# Altium PCB Pleiades.PcbDoc
Units mil, origin at the board's own origin, x right, y up, seen from the top; angles counter-clockwise.
Board outline 12244.09 x 4515.28 mil, 12 copper layers (TOP, GND1, IN1, GND2, POW1, GND3, POW2, GND4, GND5, IN2, GND6, BOT), stack 63.546 mil thick; 2 components, 552 nets, 714 pads, 1 vias.
Unrouted connection lines stored in the file: 15.
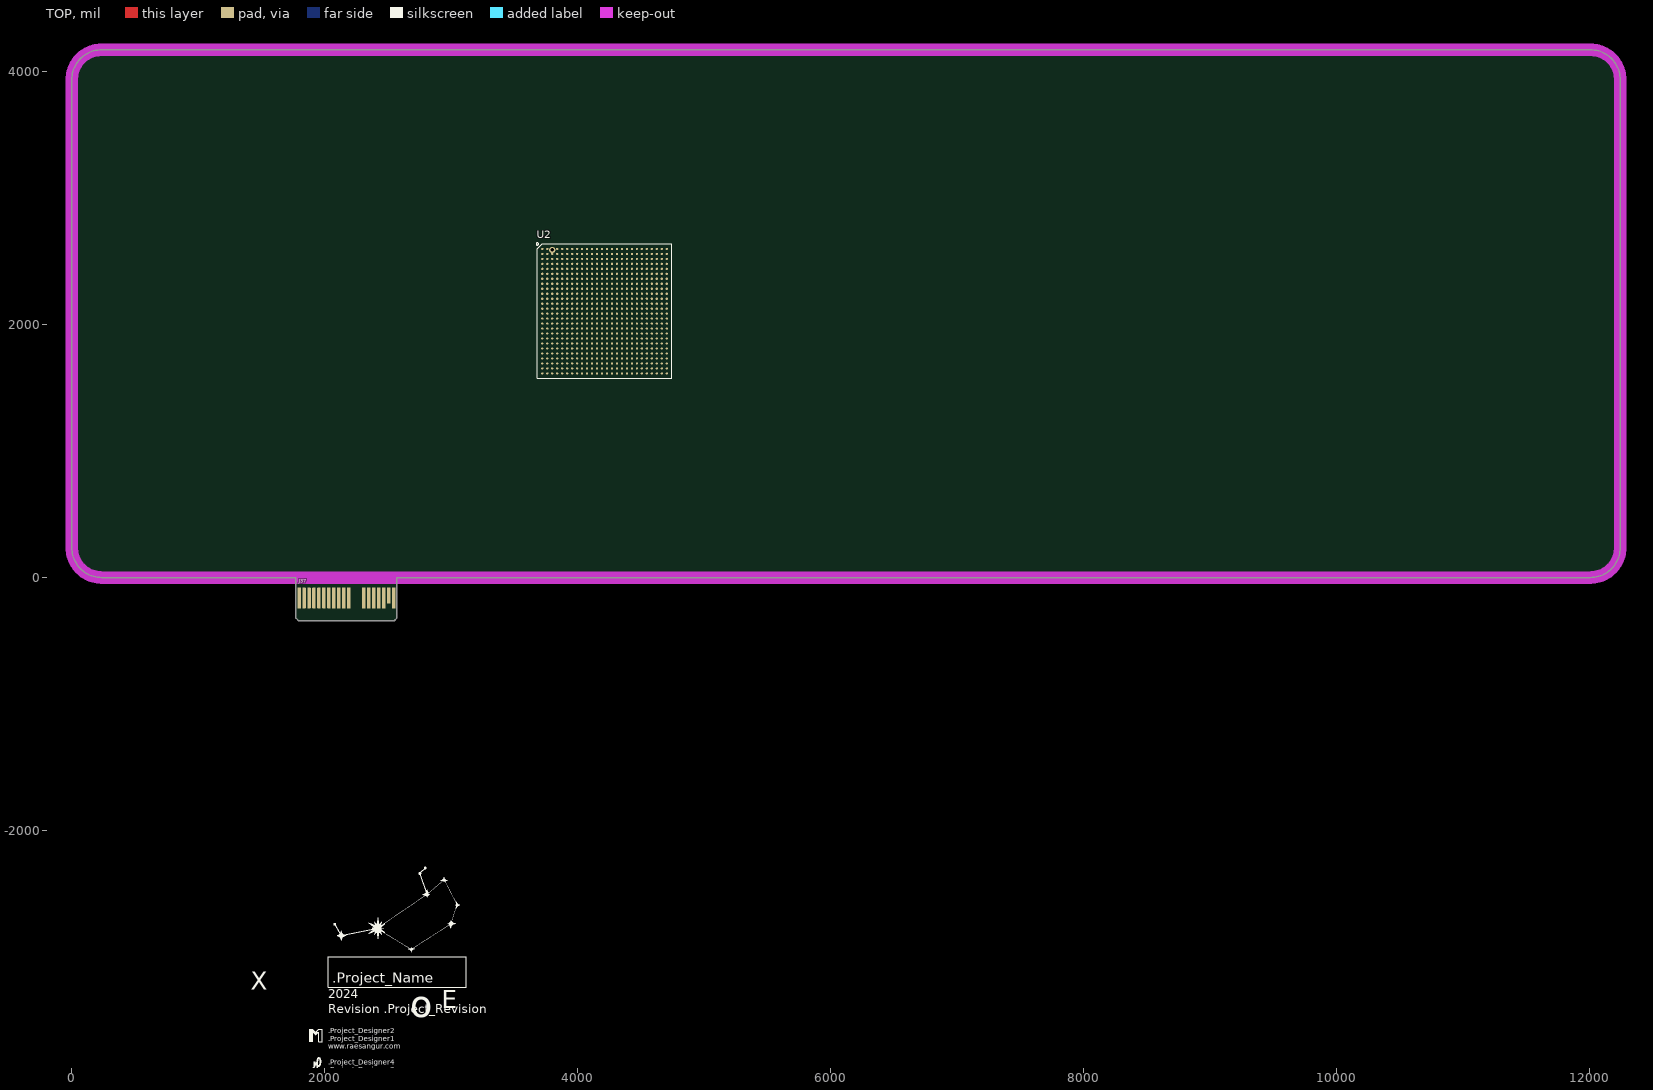
[diagram p0: TOP view]
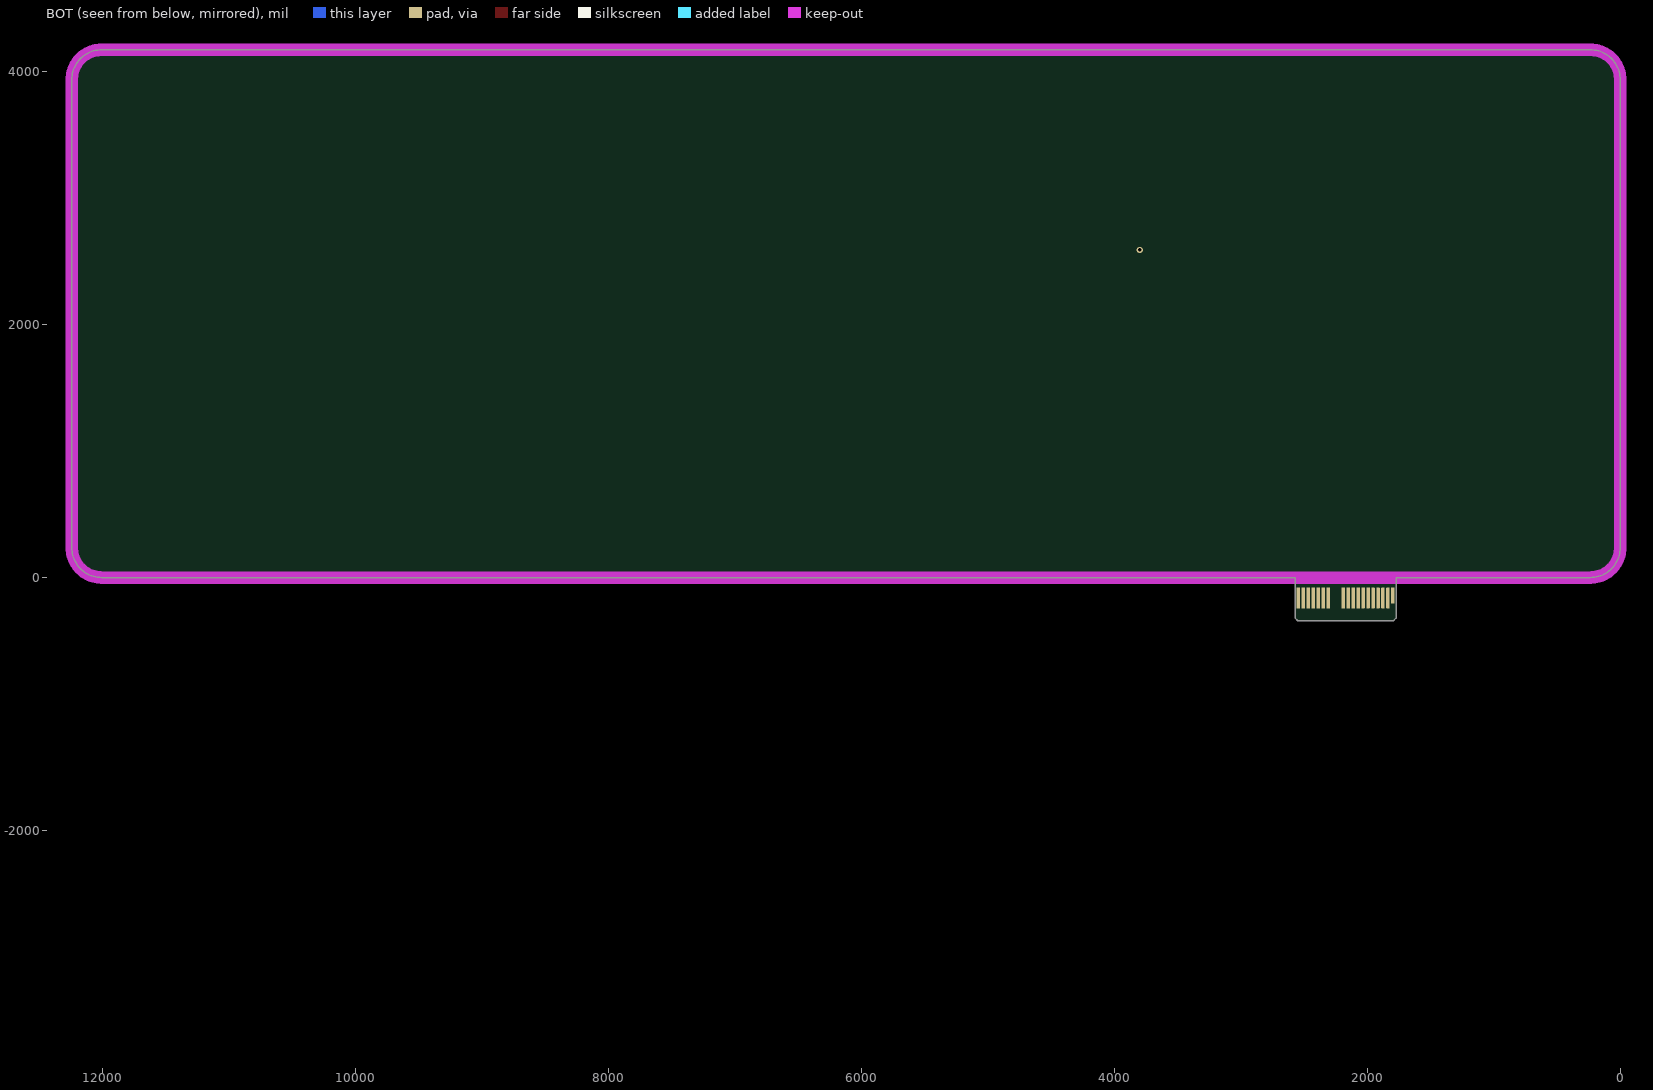
[diagram p1: BOT view, seen from below]

## Layer stack, top to bottom
Top Solder: solder mask 0.4, Solder Resist, Dk 3.5
TOP: signal copper 1.378
Dielectric 1: prepreg 3.15, ISO106/1080, Dk 3.5
GND1: signal copper 0.689
Dielectric 8: core 7, S1170G, Dk 4.4
IN1: signal copper 0.689
Dielectric 9: prepreg 3.15, ISO106/1080, Dk 3.5
GND2: signal copper 0.689
Dielectric 2: core 7, S1170G, Dk 4.4
POW1: signal copper 0.689
Dielectric 5: prepreg 3.15, ISO106/1080, Dk 3.5
GND3: signal copper 0.689
Dielectric 3: core 7, S1170G, Dk 4.4
POW2: signal copper 0.689
Dielectric 4: prepreg 3.15, ISO106/1080, Dk 3.5
GND4: signal copper 0.689
Dielectric 7: core 7, S1170G, Dk 4.4
GND5: signal copper 0.689
Dielectric 6: prepreg 3.15, ISO106/1080, Dk 3.5
IN2: signal copper 0.689
Dielectric 11: core 7, S1170G, Dk 4.4
GND6: signal copper 0.689
Dielectric 10: prepreg 3.15, ISO106/1080, Dk 3.5
BOT: signal copper 1.378
Bottom Solder: solder mask 0.4, Solder Resist, Dk 3.5

## Board outline
0,236.22 0,3937.01 cw(c236.22,3937.01) 236.22,4173.23 12007.87,4173.23 cw(c12007.87,3937.01) 12244.09,3937.01 12244.09,236.22 cw(c12007.88,236.21) 12007.87,0 2570.68,0 2570.68,-320.59 2549.21,-342.05 1793.78,-342.05 1772.31,-320.59 1772.31,0 236.22,0 cw(c236.22,236.22)

## Design rules (kind name [scope] priority, off if disabled: settings)
Clearance [All] p1: gap=6 ignorepadtopadclearanceinfootprint=FALSE except(0: Arc-Hole Track-Hole SMDPad-Hole THPad-Hole Via-Hole Fill-Hole Poly-Hole Region-Hole Text-Hole)
ComponentClearance "Schematic Component Clearance Constraint" [InComponent('F2')] p1: gap=-1 collisioncheckmode=3 verticalgap=10 showdistances=FALSE
ComponentClearance [All] p2: gap=4 collisioncheckmode=3 verticalgap=4 showdistances=FALSE
DiffPairsRouting [All] p1: maxlimit=10 minlimit=10 mostfreqgap=10 toplayer_minwidth=15 toplayer_maxwidth=15 toplayer_prefwidth=15 midlayer1_minwidth=15 midlayer1_maxwidth=15 midlayer1_prefwidth=15 midlayer2_minwidth=15 midlayer2_maxwidth=15 midlayer2_prefwidth=15 midlayer3_minwidth=15 midlayer3_maxwidth=15 midlayer3_prefwidth=15 midlayer4_minwidth=15 midlayer4_maxwidth=15 midlayer4_prefwidth=15 midlayer5_minwidth=15 midlayer5_maxwidth=15 midlayer5_prefwidth=15 midlayer6_minwidth=15 midlayer6_maxwidth=15 midlayer6_prefwidth=15 midlayer7_minwidth=15 midlayer7_maxwidth=15 midlayer7_prefwidth=15 midlayer8_minwidth=15 midlayer8_maxwidth=15 midlayer8_prefwidth=15 midlayer9_minwidth=15 midlayer9_maxwidth=15 midlayer9_prefwidth=15 midlayer10_minwidth=15 midlayer10_maxwidth=15 midlayer10_prefwidth=15 bottomlayer_minwidth=15 bottomlayer_maxwidth=15 bottomlayer_prefwidth=15 maxuncoupledlength=500
HoleSize [All] p1: absolutevalues=TRUE maxlimit=1000 minlimit=4 maxpercent=80.000 minpercent=20.000
HoleToHoleClearance [All] p1: gap=10 allowstackedmicrovias=FALSE
MinimumSolderMaskSliver [All] p1: minsoldermaskwidth=4
PlaneClearance [All] p1: clearance=6
PlaneConnect [All] p1: pad.planeconnectstyle=Relief pad.reliefexpansion=20 pad.reliefentries=4 pad.reliefconductorwidth=10 pad.reliefairgap=10 via.planeconnectstyle=Direct via.reliefexpansion=20 via.reliefentries=4 via.reliefconductorwidth=10 via.reliefairgap=10
PolygonConnect [All] p1: thpad.connectstyle=Relief thpad.reliefconductorwidth=10 thpad.reliefentries=4 thpad.polygonreliefangle="90 Angle" thpad.airgapwidth=10 smdpad.connectstyle=Direct smdpad.reliefconductorwidth=10 smdpad.reliefentries=4 smdpad.polygonreliefangle="90 Angle" smdpad.airgapwidth=10 via.connectstyle=Direct via.reliefconductorwidth=10 via.reliefentries=4 via.polygonreliefangle="90 Angle" via.airgapwidth=10
RoutingVias [All] p1: holewidth=10 width=20 viastyle="Through Hole" minholewidth=10 minwidth=20 maxholewidth=10 maxwidth=20
SilkToSilkClearance [All] p1: silktosilkclearance=4
SilkToSolderMaskClearance [IsPad] p1: minsilkscreentomaskgap=2 clearancetoexposedcopper=FALSE
SolderMaskExpansion [All] p1: expansion=2 istentingtop=FALSE
Width [All] p1: maxlimit=5 minlimit=5 preferedwidth=16.59 toplayer_prefwidth=20.9 midlayer3_prefwidth=6 midlayer4_prefwidth=6 midlayer5_prefwidth=6 midlayer6_prefwidth=6 midlayer7_prefwidth=6 midlayer8_prefwidth=6 midlayer9_prefwidth=6 midlayer10_prefwidth=6 bottomlayer_prefwidth=20.9 impedanceprofiledriven=TRUE minimp=50.000000 maximp=50.000000 favimp=50.000000
21 further rules are at their usual default settings.

## Classes and differential pairs
net class PCI: HSI0_N HSI0_P HSO0_N HSO0_P PCI_HSI0_16_N PCI_HSI0_16_P PCI_HSO0_16_N PCI_HSO0_16_P PCI_REFCLK_16_N PCI_REFCLK_16_P REFCLK_N REFCLK_P
net class MII: COL_CONFIG0 CRS_CONFIG1 INTRP MDC MDIO RST_ETH_PHY RXC RXD0 RXD1 RXD2 RXD3 RXDV RXER TXC TXD0 TXD1 TXD2 TXD3 TXEN TXER
net class IO[0..7]: IO0 IO1 IO2 IO3 IO4 IO5 IO6 IO7
component class PCI: J37
net class USB: DD_14_+ DD_14_- UD_14_+ UD_14_-
net class SD_D[0..3]: SD_D0 SD_D1 SD_D2 SD_D3
net class PROM_D[0..7]: PROM_D0 PROM_D1 PROM_D2 PROM_D3 PROM_D4 PROM_D5 PROM_D6 PROM_D7
net class JTAG: \PCI_TRST PCI_TCK PCI_TDI PCI_TDO PCI_TMS TCK_USB TDI_USB TDO_USB TMS_USB
net class ETHERNET: RD_15_+ RD_15_- RX_15_+ RX_15_- TD_15_+ TD_15_- TX_15_+ TX_15_-
net class DQ[0..15]: DQ0 DQ1 DQ2 DQ3 DQ4 DQ5 DQ6 DQ7 DQ8 DQ9 DQ10 DQ11 DQ12 DQ13 DQ14 DQ15
net class DEBUG_LED_[1..4]: DEBUG_LED_1 DEBUG_LED_2 DEBUG_LED_3 DEBUG_LED_4
net class DDR_DATA: DQ0 DQ1 DQ2 DQ3 DQ4 DQ5 DQ6 DQ7 DQ8 DQ9 DQ10 DQ11 DQ12 DQ13 DQ14 DQ15 LDQS_N LDQS_P UDQS_N UDQS_P
net class DDR_CLK: CK_N CK_P LDQS_N LDQS_P UDQS_N UDQS_P
net class DDR_ADDR: A0 A1 A2 A3 A4 A5 A6 A7 A8 A9 A10 A11 A12 A13 A14 BA0 BA1 BA2
net class DAC_DIFF: D0_N D0_P D1_N D1_P D2_N D2_P D3_N D3_P D4_N D4_P D5_N D5_P D6_N D6_P D7_N D7_P DCI_N DCI_P FRAME_N FRAME_P
net class CLK: CLK_ADC_400MHZ_3_N CLK_ADC_400MHZ_3_P CLK_ADC_OUT_N CLK_ADC_OUT_P CLK_DAC_200MHZ_3_N CLK_DAC_200MHZ_3_P CLK_FPGA_100MHZ_N CLK_FPGA_100MHZ_P OSC_125MHZ_5_N OSC_125MHZ_5_P
net class BA[0..2]: BA0 BA1 BA2
net class ACC: \CAS \DDR_CS \DDR_RESET \RAS \WE A0 A1 A2 A3 A4 A5 A6 A7 A8 A9 A10 A11 A12 A13 A14 BA0 BA1 BA2 CK_N CK_P LDM ODT UDM
net class A[0..14]: A0 A1 A2 A3 A4 A5 A6 A7 A8 A9 A10 A11 A12 A13 A14
component class "POWER INPUT": WA1
differential pair REFCLK: +REFCLK_P -REFCLK_N
differential pair PCI_REFCLK_16: +PCI_REFCLK_16_P -PCI_REFCLK_16_N
differential pair PCI_HSO0_16: +PCI_HSO0_16_P -PCI_HSO0_16_N
differential pair PCI_HSI0_16: +PCI_HSI0_16_P -PCI_HSI0_16_N
differential pair HSO0: +HSO0_P -HSO0_N
differential pair HSI0: +HSI0_P -HSI0_N
differential pair UDQS: +UDQS_P -UDQS_N
differential pair UD_14: +UD_14_+ -UD_14_-
differential pair TX_15: +TX_15_+ -TX_15_-
differential pair TD_15: +TD_15_+ -TD_15_-
differential pair RX_15: +RX_15_+ -RX_15_-
differential pair RD_15: +RD_15_+ -RD_15_-
differential pair OSC_125MHZ_5: +OSC_125MHZ_5_P -OSC_125MHZ_5_N
differential pair LDQS: +LDQS_P -LDQS_N
differential pair FRAME: +FRAME_P -FRAME_N
differential pair DD_14: +DD_14_+ -DD_14_-
differential pair DCI: +DCI_P -DCI_N
differential pair D7: +D7_P -D7_N
differential pair D6: +D6_P -D6_N
differential pair D5: +D5_P -D5_N
differential pair D4: +D4_P -D4_N
differential pair D3: +D3_P -D3_N
differential pair D2: +D2_P -D2_N
differential pair D1: +D1_P -D1_N
differential pair D0: +D0_P -D0_N
differential pair CLK_FPGA_100MHZ: +CLK_FPGA_100MHZ_P -CLK_FPGA_100MHZ_N
differential pair CLK_DAC_200MHZ_3: +CLK_DAC_200MHZ_3_P -CLK_DAC_200MHZ_3_N
differential pair CLK_ADC_OUT: +CLK_ADC_OUT_P -CLK_ADC_OUT_N
differential pair CLK_ADC_400MHZ_3: +CLK_ADC_400MHZ_3_P -CLK_ADC_400MHZ_3_N
differential pair CK: +CK_P -CK_N

## Components (designator, comment, footprint, x,y, rotation, side; value= is the part's Value field where it differs from the comment)
J37 "PCIe_x1" PCIe_x1 1797.24,-161.42 r0 top locked
U2 "XC6SLX100-3FGG676C" FPGA_XILINX_FGG676 4212.6,2106.3 r0 top

## Footprints (in the part's own frame and the unit in brackets; to place one, negate y for a bottom-side part, rotate by r counter-clockwise, add the part's x,y. Pads: shape width x height; smd on the part's side, far side on the other; paste and mask are expansions set on the pad)
FPGA_XILINX_FGG676 [mm]
  round 0.45 smd mask+0.05: A1(-12.5,12.5) A2(-11.5,12.5) A3(-10.5,12.5) A4(-9.5,12.5) A5(-8.5,12.5) A6(-7.5,12.5) A7(-6.5,12.5) A8(-5.5,12.5) A9(-4.5,12.5) A10(-3.5,12.5) A11(-2.5,12.5) A12(-1.5,12.5) A13(-0.5,12.5) A14(0.5,12.5) A15(1.5,12.5) A16(2.5,12.5) A17(3.5,12.5) A18(4.5,12.5) A19(5.5,12.5) A20(6.5,12.5) A21(7.5,12.5) A22(8.5,12.5) A23(9.5,12.5) A24(10.5,12.5) A25(11.5,12.5) A26(12.5,12.5) AA1(-12.5,-7.5) AA2(-11.5,-7.5) AA3(-10.5,-7.5) AA4(-9.5,-7.5) AA5(-8.5,-7.5) AA6(-7.5,-7.5) AA7(-6.5,-7.5) AA8(-5.5,-7.5) AA9(-4.5,-7.5) AA10(-3.5,-7.5) AA11(-2.5,-7.5) AA12(-1.5,-7.5) AA13(-0.5,-7.5) AA14(0.5,-7.5) AA15(1.5,-7.5) AA16(2.5,-7.5) AA17(3.5,-7.5) AA18(4.5,-7.5) AA19(5.5,-7.5) AA20(6.5,-7.5) AA21(7.5,-7.5) AA22(8.5,-7.5) AA23(9.5,-7.5) AA24(10.5,-7.5) AA25(11.5,-7.5) AA26(12.5,-7.5) AB1(-12.5,-8.5) AB2(-11.5,-8.5) AB3(-10.5,-8.5) AB4(-9.5,-8.5) AB5(-8.5,-8.5) AB6(-7.5,-8.5) AB7(-6.5,-8.5) AB8(-5.5,-8.5) AB9(-4.5,-8.5) AB10(-3.5,-8.5) AB11(-2.5,-8.5) AB12(-1.5,-8.5) AB13(-0.5,-8.5) AB14(0.5,-8.5) AB15(1.5,-8.5) AB16(2.5,-8.5) AB17(3.5,-8.5) AB18(4.5,-8.5) AB19(5.5,-8.5) AB20(6.5,-8.5) AB21(7.5,-8.5) AB22(8.5,-8.5) AB23(9.5,-8.5) AB24(10.5,-8.5) AB25(11.5,-8.5) AB26(12.5,-8.5) AC1(-12.5,-9.5) AC2(-11.5,-9.5) AC3(-10.5,-9.5) AC4(-9.5,-9.5) AC5(-8.5,-9.5) AC6(-7.5,-9.5) AC7(-6.5,-9.5) AC8(-5.5,-9.5) AC9(-4.5,-9.5) AC10(-3.5,-9.5) AC11(-2.5,-9.5) AC12(-1.5,-9.5) AC13(-0.5,-9.5) AC14(0.5,-9.5) AC15(1.5,-9.5) AC16(2.5,-9.5) AC17(3.5,-9.5) AC18(4.5,-9.5) AC19(5.5,-9.5) AC20(6.5,-9.5) AC21(7.5,-9.5) AC22(8.5,-9.5) AC23(9.5,-9.5) AC24(10.5,-9.5) AC25(11.5,-9.5) AC26(12.5,-9.5) AD1(-12.5,-10.5) AD2(-11.5,-10.5) AD3(-10.5,-10.5) AD4(-9.5,-10.5) AD5(-8.5,-10.5) AD6(-7.5,-10.5) AD7(-6.5,-10.5) AD8(-5.5,-10.5) AD9(-4.5,-10.5) AD10(-3.5,-10.5) AD11(-2.5,-10.5) AD12(-1.5,-10.5) AD13(-0.5,-10.5) AD14(0.5,-10.5) AD15(1.5,-10.5) AD16(2.5,-10.5) AD17(3.5,-10.5) AD18(4.5,-10.5) AD19(5.5,-10.5) AD20(6.5,-10.5) AD21(7.5,-10.5) AD22(8.5,-10.5) AD23(9.5,-10.5) AD24(10.5,-10.5) AD25(11.5,-10.5) AD26(12.5,-10.5) AE1(-12.5,-11.5) AE2(-11.5,-11.5) AE3(-10.5,-11.5) AE4(-9.5,-11.5) AE5(-8.5,-11.5) AE6(-7.5,-11.5) AE7(-6.5,-11.5) AE8(-5.5,-11.5) AE9(-4.5,-11.5) AE10(-3.5,-11.5) AE11(-2.5,-11.5) AE12(-1.5,-11.5) AE13(-0.5,-11.5) AE14(0.5,-11.5) AE15(1.5,-11.5) AE16(2.5,-11.5) AE17(3.5,-11.5) AE18(4.5,-11.5) AE19(5.5,-11.5) AE20(6.5,-11.5) AE21(7.5,-11.5) AE22(8.5,-11.5) AE23(9.5,-11.5) AE24(10.5,-11.5) AE25(11.5,-11.5) AE26(12.5,-11.5) AF1(-12.5,-12.5) AF2(-11.5,-12.5) AF3(-10.5,-12.5) AF4(-9.5,-12.5) AF5(-8.5,-12.5) AF6(-7.5,-12.5) AF7(-6.5,-12.5) AF8(-5.5,-12.5) AF9(-4.5,-12.5) AF10(-3.5,-12.5) AF11(-2.5,-12.5) AF12(-1.5,-12.5) AF13(-0.5,-12.5) AF14(0.5,-12.5) AF15(1.5,-12.5) AF16(2.5,-12.5) AF17(3.5,-12.5) AF18(4.5,-12.5) AF19(5.5,-12.5) AF20(6.5,-12.5) AF21(7.5,-12.5) AF22(8.5,-12.5) AF23(9.5,-12.5) AF24(10.5,-12.5) AF25(11.5,-12.5) AF26(12.5,-12.5) B1(-12.5,11.5) B2(-11.5,11.5) B3(-10.5,11.5) B4(-9.5,11.5) B5(-8.5,11.5) B6(-7.5,11.5) B7(-6.5,11.5) B8(-5.5,11.5) B9(-4.5,11.5) B10(-3.5,11.5) B11(-2.5,11.5) B12(-1.5,11.5) B13(-0.5,11.5) B14(0.5,11.5) B15(1.5,11.5) B16(2.5,11.5) B17(3.5,11.5) B18(4.5,11.5) B19(5.5,11.5) B20(6.5,11.5) B21(7.5,11.5) B22(8.5,11.5) B23(9.5,11.5) B24(10.5,11.5) B25(11.5,11.5) B26(12.5,11.5) C1(-12.5,10.5) C2(-11.5,10.5) C3(-10.5,10.5) C4(-9.5,10.5) C5(-8.5,10.5) C6(-7.5,10.5) C7(-6.5,10.5) C8(-5.5,10.5) C9(-4.5,10.5) C10(-3.5,10.5) C11(-2.5,10.5) C12(-1.5,10.5) C13(-0.5,10.5) C14(0.5,10.5) C15(1.5,10.5) C16(2.5,10.5) C17(3.5,10.5) C18(4.5,10.5) C19(5.5,10.5) C20(6.5,10.5) C21(7.5,10.5) C22(8.5,10.5) C23(9.5,10.5) C24(10.5,10.5) C25(11.5,10.5) C26(12.5,10.5) D1(-12.5,9.5) D2(-11.5,9.5) D3(-10.5,9.5) D4(-9.5,9.5) D5(-8.5,9.5) D6(-7.5,9.5) D7(-6.5,9.5) D8(-5.5,9.5) D9(-4.5,9.5) D10(-3.5,9.5) D11(-2.5,9.5) D12(-1.5,9.5) D13(-0.5,9.5) D14(0.5,9.5) D15(1.5,9.5) D16(2.5,9.5) D17(3.5,9.5) D18(4.5,9.5) D19(5.5,9.5) D20(6.5,9.5) D21(7.5,9.5) D22(8.5,9.5) D23(9.5,9.5) D24(10.5,9.5) D25(11.5,9.5) D26(12.5,9.5) E1(-12.5,8.5) E2(-11.5,8.5) E3(-10.5,8.5) E4(-9.5,8.5) E5(-8.5,8.5) E6(-7.5,8.5) E7(-6.5,8.5) E8(-5.5,8.5) E9(-4.5,8.5) E10(-3.5,8.5) E11(-2.5,8.5) E12(-1.5,8.5) E13(-0.5,8.5) E14(0.5,8.5) E15(1.5,8.5) E16(2.5,8.5) E17(3.5,8.5) E18(4.5,8.5) E19(5.5,8.5) E20(6.5,8.5) E21(7.5,8.5) E22(8.5,8.5) E23(9.5,8.5) E24(10.5,8.5) E25(11.5,8.5) E26(12.5,8.5) F1(-12.5,7.5) F2(-11.5,7.5) F3(-10.5,7.5) F4(-9.5,7.5) F5(-8.5,7.5) F6(-7.5,7.5) F7(-6.5,7.5) F8(-5.5,7.5) F9(-4.5,7.5) F10(-3.5,7.5) F11(-2.5,7.5) F12(-1.5,7.5) F13(-0.5,7.5) F14(0.5,7.5) F15(1.5,7.5) F16(2.5,7.5) F17(3.5,7.5) F18(4.5,7.5) F19(5.5,7.5) F20(6.5,7.5) F21(7.5,7.5) F22(8.5,7.5) F23(9.5,7.5) F24(10.5,7.5) F25(11.5,7.5) F26(12.5,7.5) G1(-12.5,6.5) G2(-11.5,6.5) G3(-10.5,6.5) G4(-9.5,6.5) G5(-8.5,6.5) G6(-7.5,6.5) G7(-6.5,6.5) G8(-5.5,6.5) G9(-4.5,6.5) G10(-3.5,6.5) G11(-2.5,6.5) G12(-1.5,6.5) G13(-0.5,6.5) G14(0.5,6.5) G15(1.5,6.5) G16(2.5,6.5) G17(3.5,6.5) G18(4.5,6.5) G19(5.5,6.5) G20(6.5,6.5) G21(7.5,6.5) G22(8.5,6.5) G23(9.5,6.5) G24(10.5,6.5) G25(11.5,6.5) G26(12.5,6.5) H1(-12.5,5.5) H2(-11.5,5.5) H3(-10.5,5.5) H4(-9.5,5.5) H5(-8.5,5.5) H6(-7.5,5.5) H7(-6.5,5.5) H8(-5.5,5.5) H9(-4.5,5.5) H10(-3.5,5.5) H11(-2.5,5.5) H12(-1.5,5.5) H13(-0.5,5.5) H14(0.5,5.5) H15(1.5,5.5) H16(2.5,5.5) H17(3.5,5.5) H18(4.5,5.5) H19(5.5,5.5) H20(6.5,5.5) H21(7.5,5.5) H22(8.5,5.5) H23(9.5,5.5) H24(10.5,5.5) H25(11.5,5.5) H26(12.5,5.5) J1(-12.5,4.5) J2(-11.5,4.5) J3(-10.5,4.5) J4(-9.5,4.5) J5(-8.5,4.5) J6(-7.5,4.5) J7(-6.5,4.5) J8(-5.5,4.5) J9(-4.5,4.5) J10(-3.5,4.5) J11(-2.5,4.5) J12(-1.5,4.5) J13(-0.5,4.5) J14(0.5,4.5) J15(1.5,4.5) J16(2.5,4.5) J17(3.5,4.5) J18(4.5,4.5) J19(5.5,4.5) J20(6.5,4.5) J21(7.5,4.5) J22(8.5,4.5) J23(9.5,4.5) J24(10.5,4.5) J25(11.5,4.5) J26(12.5,4.5) K1(-12.5,3.5) K2(-11.5,3.5) K3(-10.5,3.5) K4(-9.5,3.5) K5(-8.5,3.5) K6(-7.5,3.5) K7(-6.5,3.5) K8(-5.5,3.5) K9(-4.5,3.5) K10(-3.5,3.5) K11(-2.5,3.5) K12(-1.5,3.5) K13(-0.5,3.5) K14(0.5,3.5) K15(1.5,3.5) K16(2.5,3.5) K17(3.5,3.5) K18(4.5,3.5) K19(5.5,3.5) K20(6.5,3.5) K21(7.5,3.5) K22(8.5,3.5) K23(9.5,3.5) K24(10.5,3.5) K25(11.5,3.5) K26(12.5,3.5) L1(-12.5,2.5) L2(-11.5,2.5) L3(-10.5,2.5) L4(-9.5,2.5) L5(-8.5,2.5) L6(-7.5,2.5) L7(-6.5,2.5) L8(-5.5,2.5) L9(-4.5,2.5) L10(-3.5,2.5) L11(-2.5,2.5) L12(-1.5,2.5) L13(-0.5,2.5) L14(0.5,2.5) L15(1.5,2.5) L16(2.5,2.5) L17(3.5,2.5) L18(4.5,2.5) L19(5.5,2.5) L20(6.5,2.5) L21(7.5,2.5) L22(8.5,2.5) L23(9.5,2.5) L24(10.5,2.5) L25(11.5,2.5) L26(12.5,2.5) M1(-12.5,1.5) M2(-11.5,1.5) M3(-10.5,1.5) M4(-9.5,1.5) M5(-8.5,1.5) M6(-7.5,1.5) M7(-6.5,1.5) M8(-5.5,1.5) M9(-4.5,1.5) M10(-3.5,1.5) M11(-2.5,1.5) M12(-1.5,1.5) M13(-0.5,1.5) M14(0.5,1.5) M15(1.5,1.5) M16(2.5,1.5) M17(3.5,1.5) M18(4.5,1.5) M19(5.5,1.5) M20(6.5,1.5) M21(7.5,1.5) M22(8.5,1.5) M23(9.5,1.5) M24(10.5,1.5) M25(11.5,1.5) M26(12.5,1.5) N1(-12.5,0.5) N2(-11.5,0.5) N3(-10.5,0.5) N4(-9.5,0.5) N5(-8.5,0.5) N6(-7.5,0.5) N7(-6.5,0.5) N8(-5.5,0.5) N9(-4.5,0.5) N10(-3.5,0.5) N11(-2.5,0.5) N12(-1.5,0.5) N13(-0.5,0.5) N14(0.5,0.5) N15(1.5,0.5) N16(2.5,0.5) N17(3.5,0.5) N18(4.5,0.5) N19(5.5,0.5) N20(6.5,0.5) N21(7.5,0.5) N22(8.5,0.5) N23(9.5,0.5) N24(10.5,0.5) N25(11.5,0.5) N26(12.5,0.5) P1(-12.5,-0.5) P2(-11.5,-0.5) P3(-10.5,-0.5) P4(-9.5,-0.5) P5(-8.5,-0.5) P6(-7.5,-0.5) P7(-6.5,-0.5) P8(-5.5,-0.5) P9(-4.5,-0.5) P10(-3.5,-0.5) P11(-2.5,-0.5) P12(-1.5,-0.5) P13(-0.5,-0.5) P14(0.5,-0.5) P15(1.5,-0.5) P16(2.5,-0.5) P17(3.5,-0.5) P18(4.5,-0.5) P19(5.5,-0.5) P20(6.5,-0.5) P21(7.5,-0.5) P22(8.5,-0.5) P23(9.5,-0.5) P24(10.5,-0.5) P25(11.5,-0.5) P26(12.5,-0.5) R1(-12.5,-1.5) R2(-11.5,-1.5) R3(-10.5,-1.5) R4(-9.5,-1.5) R5(-8.5,-1.5) R6(-7.5,-1.5) R7(-6.5,-1.5) R8(-5.5,-1.5) R9(-4.5,-1.5) R10(-3.5,-1.5) R11(-2.5,-1.5) R12(-1.5,-1.5) R13(-0.5,-1.5) R14(0.5,-1.5) R15(1.5,-1.5) R16(2.5,-1.5) R17(3.5,-1.5) R18(4.5,-1.5) R19(5.5,-1.5) R20(6.5,-1.5) R21(7.5,-1.5) R22(8.5,-1.5) R23(9.5,-1.5) R24(10.5,-1.5) R25(11.5,-1.5) R26(12.5,-1.5) T1(-12.5,-2.5) T2(-11.5,-2.5) T3(-10.5,-2.5) T4(-9.5,-2.5) T5(-8.5,-2.5) T6(-7.5,-2.5) T7(-6.5,-2.5) T8(-5.5,-2.5) T9(-4.5,-2.5) T10(-3.5,-2.5) T11(-2.5,-2.5) T12(-1.5,-2.5) T13(-0.5,-2.5) T14(0.5,-2.5) T15(1.5,-2.5) T16(2.5,-2.5) T17(3.5,-2.5) T18(4.5,-2.5) T19(5.5,-2.5) T20(6.5,-2.5) T21(7.5,-2.5) T22(8.5,-2.5) T23(9.5,-2.5) T24(10.5,-2.5) T25(11.5,-2.5) T26(12.5,-2.5) U1(-12.5,-3.5) U2(-11.5,-3.5) U3(-10.5,-3.5) U4(-9.5,-3.5) U5(-8.5,-3.5) U6(-7.5,-3.5) U7(-6.5,-3.5) U8(-5.5,-3.5) U9(-4.5,-3.5) U10(-3.5,-3.5) U11(-2.5,-3.5) U12(-1.5,-3.5) U13(-0.5,-3.5) U14(0.5,-3.5) U15(1.5,-3.5) U16(2.5,-3.5) U17(3.5,-3.5) U18(4.5,-3.5) U19(5.5,-3.5) U20(6.5,-3.5) U21(7.5,-3.5) U22(8.5,-3.5) U23(9.5,-3.5) U24(10.5,-3.5) U25(11.5,-3.5) U26(12.5,-3.5) V1(-12.5,-4.5) V2(-11.5,-4.5) V3(-10.5,-4.5) V4(-9.5,-4.5) V5(-8.5,-4.5) V6(-7.5,-4.5) V7(-6.5,-4.5) V8(-5.5,-4.5) V9(-4.5,-4.5) V10(-3.5,-4.5) V11(-2.5,-4.5) V12(-1.5,-4.5) V13(-0.5,-4.5) V14(0.5,-4.5) V15(1.5,-4.5) V16(2.5,-4.5) V17(3.5,-4.5) V18(4.5,-4.5) V19(5.5,-4.5) V20(6.5,-4.5) V21(7.5,-4.5) V22(8.5,-4.5) V23(9.5,-4.5) V24(10.5,-4.5) V25(11.5,-4.5) V26(12.5,-4.5) W1(-12.5,-5.5) W2(-11.5,-5.5) W3(-10.5,-5.5) W4(-9.5,-5.5) W5(-8.5,-5.5) W6(-7.5,-5.5) W7(-6.5,-5.5) W8(-5.5,-5.5) W9(-4.5,-5.5) W10(-3.5,-5.5) W11(-2.5,-5.5) W12(-1.5,-5.5) W13(-0.5,-5.5) W14(0.5,-5.5) W15(1.5,-5.5) W16(2.5,-5.5) W17(3.5,-5.5) W18(4.5,-5.5) W19(5.5,-5.5) W20(6.5,-5.5) W21(7.5,-5.5) W22(8.5,-5.5) W23(9.5,-5.5) W24(10.5,-5.5) W25(11.5,-5.5) W26(12.5,-5.5) Y1(-12.5,-6.5) Y2(-11.5,-6.5) Y3(-10.5,-6.5) Y4(-9.5,-6.5) Y5(-8.5,-6.5) Y6(-7.5,-6.5) Y7(-6.5,-6.5) Y8(-5.5,-6.5) Y9(-4.5,-6.5) Y10(-3.5,-6.5) Y11(-2.5,-6.5) Y12(-1.5,-6.5) Y13(-0.5,-6.5) Y14(0.5,-6.5) Y15(1.5,-6.5) Y16(2.5,-6.5) Y17(3.5,-6.5) Y18(4.5,-6.5) Y19(5.5,-6.5) Y20(6.5,-6.5) Y21(7.5,-6.5) Y22(8.5,-6.5) Y23(9.5,-6.5) Y24(10.5,-6.5) Y25(11.5,-6.5) Y26(12.5,-6.5)
  silkscreen extent -13.75,-13.5 13.5,13.75, body extent -13.5,-13.53 13.5,13.47, height 2.24
PCIe_x1 [mm] "https://tools.molex.com/pdm_docs/sd/877159006_sd.pdf"
  rrect10% 0.7x3.2 smd far side: A1(0,0.5)
  rrect25% 0.7x4.2 smd far side: A2(1,0) A3(2,0) A4(3,0) A5(4,0) A6(5,0) A7(6,0) A8(7,0) A9(8,0) A10(9,0) A11(10,0) A12(13,0) A13(14,0) A14(15,0) A15(16,0) A16(17,0) A17(18,0) A18(19,0)
  rrect10% 0.7x4.2 smd: B1(0,0)
  rrect25% 0.7x4.2 smd: B2(1,0) B3(2,0) B4(3,0) B5(4,0) B6(5,0) B7(6,0) B8(7,0) B9(8,0) B10(9,0) B11(10,0) B12(13,0) B13(14,0) B14(15,0) B15(16,0) B16(17,0) B18(19,0)
  rrect25% 0.7x3.2 smd: B17(18,0.5)
  round 0.381 on Top Overlay: ""(0,2.54)
  round 0.381 on Bottom Overlay: ""(0,2.54)

## Part data
U2: library part FPGA_XC6SLX100-3FGG676C, "FPGA - XILINX SPARTAN 6 480 I/O - BGA-676", Package=BGA-676, Supplier Part Number 1=122-1760-ND, Temperature="0°C ~ 85°C (TJ)", Voltage="1.14 V ~ 1.26 V", CreatedBy="Jonathan Bouchard", HelpURL=https://www.xilinx.com/support/documentation/data_sheets/ds162.pdf, Mfg=Xilinx, Mfg Part Number=XC6SLX100-3FGG676C, Supplier 1=Digikey

## Via types
v1: diameter 50, hole 28, TOP to BOT, 1 vias

## Nets (pads, with @x,y where several pads share a name; then routed paths per layer and width w, separated by ;. In a path a pad name is that pad's centre, name@x,y a point inside that pad or via, vN(x,y) a via of type N, cw(c..) or ccw(c..) an arc to the next point about the centre after c; other vN are vias at no path point)
3V3D: 
+1V2_VOLT: 
+1V2D_CURR_23: 
+1V2D_ETH: 
+1V2D_SHUNT+_17: 
+1V2D_SHUNT-_17: 
+1V8D_CURR_23: 
+1V8D_SHUNT+_17: 
+1V8D_SHUNT-_17: 
+1V8D_VOLT: 
+2V5_VOLT_23: 
+2V5D: 
+2V5D_CURR_23: 
+2V5D_SHUNT+_17: 
+2V5D_SHUNT-_17: 
+3V3_PCI: J37.A9 J37.A10 J37.B8
+3V3_SENSE: 
+3V3A: 
+3V3A_EN: 
+3V3A_ETH: 
+3V3D: 
+3V3D_CURR_23: 
+3V3D_ETH: 
+3V3D_SHUNT+_17: 
+3V3D_SHUNT-_17: 
+3V3D_VOLT_23: 
+5V0A: 
+5V0A_EN: 
+5V_MOT: 
+5V_USB_IN: 
+6V: 
+6V0_CURR_23: 
+6V0_VOLT_23: 
+6V_EN: 
+6V_SHUNT+_17: 
+6V_SHUNT-_17: 
+12V: 
+12V_CURR_23: 
+12V_MOT_SHUNT+_22: 
+12V_MOT_SHUNT-_22: 
+12V_PCI: J37.A2 J37.A3 J37.B1 J37.B2 J37.B3
+12V_SHUNT+_17: 
+12V_SHUNT-_17: 
+12V_VOLT_23: 
+24V_FILTER_CM: 
+24V_FILTER_DM: 
+24V_FUSE: 
+24V_IN: 
+24V_MOT: 
+24V_PROT_18: 
+24V_RAW: 
+DDR_VREF: 
+VCC_OSC: 
+VCC_PLL: 
+VCC_USB: 
+VDDR: 
+VDDR_VOLT_23: 
+VREF_DDR: 
+VTT: 
+VTT_VOLT_23: 
-5V0A: 
-5V0A_EN: 
-6V: 
-6V0_CURR_23: 
-6V_EN: 
-6V_SHUNT+_17: 
-6V_SHUNT-_17: 
\CAS: 
\CE: 
\CEO: 
\CF: 
\CS: 
\DDR_CS: 
\DDR_RESET: 
\ENABLE_12: 
\ENABLE_ISO: 
\HOME_12: 
\HOME_ISO: 
\IRQ: 
\PCI_PERST_16: J37.A11
\PCI_RST: 
\PCI_TRST: 
\PCI_TRST_16: J37.B9
\PCI_WAKE_16: J37.B11
\PD2_10: 
\PERST_PCI: 
\PLL_SYNC: 
\RAS: 
\RESET_12: 
\RESET_ISO: 
\RST_DAC: 
\RST_ETH_15: 
\SENSE_CS: 
\SLEEP_12: 
\SLEEP_ISO: 
\TAG_RST: 
\TAG_TRST_7: 
\VBUS_DETECT_14: 
\WAKE_PCI: 
\WDT_EN: 
\WE: 
A0: 
A1: 
A2: 
A3: 
A4: 
A5: 
A6: 
A7: 
A8: 
A9: 
A10: 
A11: 
A12: 
A13: 
A14: 
ACT_LED_ETH_15: 
ADC_CM_10: 
ADC_CTRL1: 
ADC_CTRL2: 
ADC_CTRL3: 
ADCI_23: 
ADCO_23: 
AOUT1_12: 
AOUT2_12: 
BA0: 
BA1: 
BA2: 
BOUT1_12: 
BOUT2_12: 
BTN_1: 
BTN_2: 
BUSY: 
CC1_14: 
CC2_14: 
CK_N: 
CK_P: 
CKE: 
CLK: 
CLK_ADC_400MHZ_3_N: 
CLK_ADC_400MHZ_3_P: 
CLK_ADC_OUT_N: 
CLK_ADC_OUT_P: 
CLK_DAC_200MHZ_3_N: 
CLK_DAC_200MHZ_3_P: 
CLK_FPGA_100MHZ_N: 
CLK_FPGA_100MHZ_P: 
CLKOUT: 
COL_CONFIG0: 
CRS_CONFIG1: 
D0_N: 
D0_P: 
D1_N: 
D1_P: 
D2_N: 
D2_P: 
D3_N: 
D3_P: 
D4_N: 
D4_P: 
D5_N: 
D5_P: 
D6_N: 
D6_P: 
D7_N: 
D7_P: 
DA0_N: 
DA0_P: 
DA2_N: 
DA2_P: 
DA4_N: 
DA4_P: 
DA6_N: 
DA6_P: 
DA8_N: 
DA8_P: 
DA10_N: 
DA10_P: 
DA12_N: 
DA12_P: 
DB0_N: 
DB0_P: 
DB2_N: 
DB2_P: 
DB4_N: 
DB4_P: 
DB6_N: 
DB6_P: 
DB8_N: 
DB8_P: 
DB10_N: 
DB10_P: 
DB12_N: 
DB12_P: 
DCI_N: 
DCI_P: 
DD_14_+: 
DD_14_-: 
DDR_PWR_EN: 
DDR_SW_EN: 
DDR_VTT_EN: 
DEBUG_LED_1: 
DEBUG_LED_2: 
DEBUG_LED_3: 
DEBUG_LED_4: 
DECAY_12: 
DIR_12: 
DIR_ISO: 
DQ0: 
DQ1: 
DQ2: 
DQ3: 
DQ4: 
DQ5: 
DQ6: 
DQ7: 
DQ8: 
DQ9: 
DQ10: 
DQ11: 
DQ12: 
DQ13: 
DQ14: 
DQ15: 
EN_EXT_SEL: 
ETHERNET_GROUND: 
EXT_TCK_7: 
EXT_TDI_7: 
EXT_TDO_7: 
EXT_TMS_7: 
FAN_PWM: 
FAN_TACH: 
FGPA_TDO: 
FRAME_N: 
FRAME_P: 
GND: 
GND_FILTER_CM: 
GND_FILTER_DM: 
GND_IN: 
GND_MOT: 
GND_RAW: 
HOT_PLUG_16: J37.A1 J37.B17
HSI0_N: 
HSI0_P: 
HSO0_N: 
HSO0_P: 
INTRP: 
IO0: 
IO1: 
IO2: 
IO3: 
IO4: 
IO5: 
IO6: 
IO7: 
LDM: 
LDQS_N: 
LDQS_P: 
M0_8: 
M1_8: 
MDC: 
MDIO: 
MISO: 
MOSI: 
MOT_ADC_VREF_22: 
MOT_AMP_VREF_22: 
MOT_CURR_SPI.\CS: 
MOT_CURR_SPI.DO: 
MOT_CURR_SPI.FS: 
MOT_CURR_SPI.SCLK: 
NetC1_1: 
NetC2_1: 
NetC3_1: 
NetC4_1: 
NetC5_1: 
NetC6_1: 
NetC188_1: 
NetC278_2: 
NetC336_1: 
NetC337_1: 
NetC338_1: 
NetC339_1: 
NetC340_1: 
NetC341_1: 
NetC342_1: 
NetC343_1: 
NetC344_1: 
NetC345_1: 
NetC346_1: 
NetC393_1: 
NetC433_1: 
NetC492_1: 
NetC494_1: 
NetC540_1: 
NetD4_1: 
NetD18_1: 
NetD19_1: 
NetD21_1: 
NetD22_1: 
NetD31_1: 
NetD32_1: 
NetD38_1: 
NetD39_1: 
NetD43_1: 
NetD43_2: 
NetD44_1: 
NetD45_1: 
NetD46_1: 
NetD47_1: 
NetD48_1: 
NetD48_2: 
NetD49_1: 
NetD52_1: 
NetD53_1: 
NetISO1_1: 
NetISO2_4: 
NetISO2_5: 
NetISO2_12: 
NetISO2_13: 
NetISO3_1: 
NetJ1_7: 
NetJ1_10: 
NetJ10_3: 
NetJ10_4: 
NetJ23_1: 
NetJ25_1: 
NetJ35_A6: 
NetJ35_A7: 
NetJ36_11: 
NetL5_1: 
NetL5_2: 
NetL6_1: 
NetL6_2: 
NetL7_1: 
NetL7_2: 
NetL8_1: 
NetL8_2: 
NetL9_1: 
NetL10_1: 
NetL11_1: 
NetL12_1: 
NetL14_2: 
NetL14_3: 
NetM1_9: 
NetNT1_1: 
NetNT2_1: 
NetNT3_1: 
NetNT4_1: 
NetNT5_1: 
NetNT6_1: 
NetNT7_1: 
NetNT8_1: 
NetNT9_1: 
NetNT11_1: 
NetNT14_1: 
NetNT15_1: 
NetNT17_1: 
NetNT19_1: 
NetNT21_1: 
NetNT23_1: 
NetQ1_1: 
NetQ1_2: 
NetR79_2: 
NetR80_2: 
NetR86_2: 
NetR92_2: 
NetR93_2: 
NetR99_2: 
NetR105_2: 
NetR111_2: 
NetR113_2: 
NetR119_2: 
NetR180_1: 
NetR186_1: 
NetR192_1: 
NetR194_1: 
NetR197_1: 
NetR198_1: 
NetR199_1: 
NetR200_1: 
NetR203_1: 
NetR204_1: 
NetR205_1: 
NetR206_1: 
NetR207_1: 
NetR208_1: 
NetR209_1: 
NetR210_1: 
NetR211_1: 
NetR213_1: 
NetR215_1: 
NetR216_1: 
NetR222_1: 
NetR233_1: 
NetR236_1: 
NetR237_1: 
NetR238_1: 
NetR239_1: 
NetR249_2: 
NetR254_1: 
NetR260_1: 
NetR271_2: 
NetR304_1: 
NetR305_1: 
NetR309_1: 
NetTP120_1: 
NetU31_11: 
NetU31_12: 
NetU31_13: 
NO_C0_15: 
NO_C1_15: 
ODT: 
OE/RESET: 
OSC_125MHZ_5_N: 
OSC_125MHZ_5_P: 
PCI_GND: J37.A4 J37.A12 J37.A15 J37.A18 J37.B4 J37.B7 J37.B13 J37.B16 J37.B18
PCI_HSI0_16_N: J37.A17
PCI_HSI0_16_P: J37.A16
PCI_HSO0_16_N: J37.B15
PCI_HSO0_16_P: J37.B14
PCI_REFCLK_16_N: J37.A14
PCI_REFCLK_16_P: J37.A13
PCI_SMCLK_16: J37.B5
PCI_SMDAT_16: J37.B6
PCI_TCK: 
PCI_TCK_16: J37.A5
PCI_TDI: 
PCI_TDI_16: J37.A6
PCI_TDO: 
PCI_TDO_16: J37.A7
PCI_TMS: 
PCI_TMS_16: J37.A8
PLL_LOCK: 
PLL_SPI_CLK: 
PLL_SPI_LE: 
PLL_SPI_MISO: 
PLL_SPI_MOSI: 
PROGRAM_B: 
PROM_D0: 
PROM_D1: 
PROM_D2: 
PROM_D3: 
PROM_D4: 
PROM_D5: 
PROM_D6: 
PROM_D7: 
PROM_TCK: 
PROM_TDO: 
PROM_TMS: 
RCA_12: 
RCB_12: 
RD_15_+: 
RD_15_-: 
RDCT_15: 
REF_CLK_N: 
REF_CLK_P: 
REFCLK_N: 
REFCLK_P: 
RESET: 
REV_SEL0: 
REV_SEL1: 
RFUSE: 
RST_ETH_PHY: 
RX_15_+: 
RX_15_-: 
RXC: 
RXCT_15: 
RXD0: 
RXD1: 
RXD2: 
RXD3: 
RXDV: 
RXER: 
RZQ_8: 
SCL1: 
SCL2: 
SCL3: 
SCLK: 
SD_CLK: 
SD_CMD: 
SD_D0: 
SD_D1: 
SD_D2: 
SD_D3: 
SD_DET: 
SDA1: 
SDA2: 
SDA3: 
SDIO: 
SEN: 
SENSE_MISO: 
SENSE_MOSI: 
SENSE_SCLK: 
SERIAL_NO: 
SMA_IN1_10: 
SMA_IN2_10: 
SMA_OUT1_11: 
SMA_OUT2_11: 
SMCLK_PCI: 
SMDAT_PCI: 
SR_12: 
SR_ISO: 
STEP_12: 
STEP_ISO: 
SUSPEND: 
TAG_TCK_7: 
TAG_TDI_7: 
TAG_TDO_7: 
TAG_TMS_7: 
TCK_USB: 
TD_15_+: 
TD_15_-: 
TDCT_15: 
TDI: 
TDI_USB: 
TDO_USB: 
TMS_USB: 
TX_15_+: 
TX_15_-: 
TXC: 
TXCT_15: 
TXD0: 
TXD1: 
TXD2: 
TXD3: 
TXEN: 
TXENABLE: 
TXER: 
UD_14_+: 
UD_14_-: 
UDM: 
UDQS_N: 
UDQS_P: 
USB_CTS: 
USB_GND: 
USB_RTS: 
USB_RX: 
USB_TX: 
USM0_12: 
USM0_ISO: 
USM1_12: 
USM1_ISO: 
VBATT: 
VBUS_DETECT_14: 
VCCAUX: 
VCCINT: 
VDD1_PCI: 
VDD2_PCI: 
VFS: 
VTT_PG: 
WDT.\WDT_OUT: 
WDT_IN: 
pads on no net: J37. J37.B10 J37.B12 U2.A1 U2.A2 U2.A3 U2.A4 U2.A5 U2.A6 U2.A7 U2.A8 U2.A9 U2.A10 U2.A11 U2.A12 U2.A13 U2.A14 U2.A15 U2.A16 U2.A17 U2.A18 U2.A19 U2.A20 U2.A21 U2.A22 U2.A23 U2.A24 U2.A25 U2.A26 U2.AA1 U2.AA2 U2.AA3 U2.AA4 U2.AA5 U2.AA6 U2.AA7 U2.AA8 U2.AA9 U2.AA10 U2.AA11 U2.AA12 U2.AA13 U2.AA14 U2.AA15 U2.AA16 U2.AA17 U2.AA18 U2.AA19 U2.AA20 U2.AA21 U2.AA22 U2.AA23 U2.AA24 U2.AA25 U2.AA26 U2.AB1 U2.AB2 U2.AB3 U2.AB4 U2.AB5 U2.AB6 U2.AB7 U2.AB8 U2.AB9 U2.AB10 U2.AB11 U2.AB12 U2.AB13 U2.AB14 U2.AB15 U2.AB16 U2.AB17 U2.AB18 U2.AB19 U2.AB20 U2.AB21 U2.AB22 U2.AB23 U2.AB24 U2.AB25 U2.AB26 U2.AC1 U2.AC2 U2.AC3 U2.AC4 U2.AC5 U2.AC6 U2.AC7 U2.AC8 U2.AC9 U2.AC10 U2.AC11 U2.AC12 U2.AC13 U2.AC14 U2.AC15 U2.AC16 U2.AC17 U2.AC18 U2.AC19 U2.AC20 U2.AC21 U2.AC22 U2.AC23 U2.AC24 U2.AC25 U2.AC26 U2.AD1 U2.AD2 U2.AD3 U2.AD4 U2.AD5 U2.AD6 U2.AD7 U2.AD8 U2.AD9 U2.AD10 U2.AD11 U2.AD12 U2.AD13 U2.AD14 U2.AD15 U2.AD16 U2.AD17 U2.AD18 U2.AD19 U2.AD20 U2.AD21 U2.AD22 U2.AD23 U2.AD24 U2.AD25 U2.AD26 U2.AE1 U2.AE2 U2.AE3 U2.AE4 U2.AE5 U2.AE6 U2.AE7 U2.AE8 U2.AE9 U2.AE10 U2.AE11 U2.AE12 U2.AE13 U2.AE14 U2.AE15 U2.AE16 U2.AE17 U2.AE18 U2.AE19 U2.AE20 U2.AE21 U2.AE22 U2.AE23 U2.AE24 U2.AE25 U2.AE26 U2.AF1 U2.AF2 U2.AF3 U2.AF4 U2.AF5 U2.AF6 U2.AF7 U2.AF8 U2.AF9 U2.AF10 U2.AF11 U2.AF12 U2.AF13 U2.AF14 U2.AF15 U2.AF16 U2.AF17 U2.AF18 U2.AF19 U2.AF20 U2.AF21 U2.AF22 U2.AF23 U2.AF24 U2.AF25 U2.AF26 U2.B1 U2.B2 U2.B3 U2.B4 U2.B5 U2.B6 U2.B7 U2.B8 U2.B9 U2.B10 U2.B11 U2.B12 U2.B13 U2.B14 U2.B15 U2.B16 U2.B17 U2.B18 U2.B19 U2.B20 U2.B21 U2.B22 U2.B23 U2.B24 U2.B25 U2.B26 U2.C1 U2.C2 U2.C3 U2.C4 U2.C5 U2.C6 U2.C7 U2.C8 U2.C9 U2.C10 U2.C11 U2.C12 U2.C13 U2.C14 U2.C15 U2.C16 U2.C17 U2.C18 U2.C19 U2.C20 U2.C21 U2.C22 U2.C23 U2.C24 U2.C25 U2.C26 U2.D1 U2.D2 U2.D3 U2.D4 U2.D5 U2.D6 U2.D7 U2.D8 U2.D9 U2.D10 U2.D11 U2.D12 U2.D13 U2.D14 U2.D15 U2.D16 U2.D17 U2.D18 U2.D19 U2.D20 U2.D21 U2.D22 U2.D23 U2.D24 U2.D25 U2.D26 U2.E1 U2.E2 U2.E3 U2.E4 U2.E5 U2.E6 U2.E7 U2.E8 U2.E9 U2.E10 U2.E11 U2.E12 U2.E13 U2.E14 U2.E15 U2.E16 U2.E17 U2.E18 U2.E19 U2.E20 U2.E21 U2.E22 U2.E23 U2.E24 U2.E25 U2.E26 U2.F1 U2.F2 U2.F3 U2.F4 U2.F5 U2.F6 U2.F7 U2.F8 U2.F9 U2.F10 U2.F11 U2.F12 U2.F13 U2.F14 U2.F15 U2.F16 U2.F17 U2.F18 U2.F19 U2.F20 U2.F21 U2.F22 U2.F23 U2.F24 U2.F25 U2.F26 U2.G1 U2.G2 U2.G3 U2.G4 U2.G5 U2.G6 U2.G7 U2.G8 U2.G9 U2.G10 U2.G11 U2.G12 U2.G13 U2.G14 U2.G15 U2.G16 U2.G17 U2.G18 U2.G19 U2.G20 U2.G21 U2.G22 U2.G23 U2.G24 U2.G25 U2.G26 U2.H1 U2.H2 U2.H3 U2.H4 U2.H5 U2.H6 U2.H7 U2.H8 U2.H9 U2.H10 U2.H11 U2.H12 U2.H13 U2.H14 U2.H15 U2.H16 U2.H17 U2.H18 U2.H19 U2.H20 U2.H21 U2.H22 U2.H23 U2.H24 U2.H25 U2.H26 U2.J1 U2.J2 U2.J3 U2.J4 U2.J5 U2.J6 U2.J7 U2.J8 U2.J9 U2.J10 U2.J11 U2.J12 U2.J13 U2.J14 U2.J15 U2.J16 U2.J17 U2.J18 U2.J19 U2.J20 U2.J21 U2.J22 U2.J23 U2.J24 U2.J25 U2.J26 U2.K1 U2.K2 U2.K3 U2.K4 U2.K5 U2.K6 U2.K7 U2.K8 U2.K9 U2.K10 U2.K11 U2.K12 U2.K13 U2.K14 U2.K15 U2.K16 U2.K17 U2.K18 U2.K19 U2.K20 U2.K21 U2.K22 U2.K23 U2.K24 U2.K25 U2.K26 U2.L1 U2.L2 U2.L3 U2.L4 U2.L5 U2.L6 U2.L7 U2.L8 U2.L9 U2.L10 U2.L11 U2.L12 U2.L13 U2.L14 U2.L15 U2.L16 U2.L17 U2.L18 U2.L19 U2.L20 U2.L21 U2.L22 U2.L23 U2.L24 U2.L25 U2.L26 U2.M1 U2.M2 U2.M3 U2.M4 U2.M5 U2.M6 U2.M7 U2.M8 U2.M9 U2.M10 U2.M11 U2.M12 U2.M13 U2.M14 U2.M15 U2.M16 U2.M17 U2.M18 U2.M19 U2.M20 U2.M21 U2.M22 U2.M23 U2.M24 U2.M25 U2.M26 U2.N1 U2.N2 U2.N3 U2.N4 U2.N5 U2.N6 U2.N7 U2.N8 U2.N9 U2.N10 U2.N11 U2.N12 U2.N13 U2.N14 U2.N15 U2.N16 U2.N17 U2.N18 U2.N19 U2.N20 U2.N21 U2.N22 U2.N23 U2.N24 U2.N25 U2.N26 U2.P1 U2.P2 U2.P3 U2.P4 U2.P5 U2.P6 U2.P7 U2.P8 U2.P9 U2.P10 U2.P11 U2.P12 U2.P13 U2.P14 U2.P15 U2.P16 U2.P17 U2.P18 U2.P19 U2.P20 U2.P21 U2.P22 U2.P23 U2.P24 U2.P25 U2.P26 U2.R1 U2.R2 U2.R3 U2.R4 U2.R5 U2.R6 U2.R7 U2.R8 U2.R9 U2.R10 U2.R11 U2.R12 U2.R13 U2.R14 U2.R15 U2.R16 U2.R17 U2.R18 U2.R19 U2.R20 U2.R21 U2.R22 U2.R23 U2.R24 U2.R25 U2.R26 U2.T1 U2.T2 U2.T3 U2.T4 U2.T5 U2.T6 U2.T7 U2.T8 U2.T9 U2.T10 U2.T11 U2.T12 U2.T13 U2.T14 U2.T15 U2.T16 U2.T17 U2.T18 U2.T19 U2.T20 U2.T21 U2.T22 U2.T23 U2.T24 U2.T25 U2.T26 U2.U1 U2.U2 U2.U3 U2.U4 U2.U5 U2.U6 U2.U7 U2.U8 U2.U9 U2.U10 U2.U11 U2.U12 U2.U13 U2.U14 U2.U15 U2.U16 U2.U17 U2.U18 U2.U19 U2.U20 U2.U21 U2.U22 U2.U23 U2.U24 U2.U25 U2.U26 U2.V1 U2.V2 U2.V3 U2.V4 U2.V5 U2.V6 U2.V7 U2.V8 U2.V9 U2.V10 U2.V11 U2.V12 U2.V13 U2.V14 U2.V15 U2.V16 U2.V17 U2.V18 U2.V19 U2.V20 U2.V21 U2.V22 U2.V23 U2.V24 U2.V25 U2.V26 U2.W1 U2.W2 U2.W3 U2.W4 U2.W5 U2.W6 U2.W7 U2.W8 U2.W9 U2.W10 U2.W11 U2.W12 U2.W13 U2.W14 U2.W15 U2.W16 U2.W17 U2.W18 U2.W19 U2.W20 U2.W21 U2.W22 U2.W23 U2.W24 U2.W25 U2.W26 U2.Y1 U2.Y2 U2.Y3 U2.Y4 U2.Y5 U2.Y6 U2.Y7 U2.Y8 U2.Y9 U2.Y10 U2.Y11 U2.Y12 U2.Y13 U2.Y14 U2.Y15 U2.Y16 U2.Y17 U2.Y18 U2.Y19 U2.Y20 U2.Y21 U2.Y22 U2.Y23 U2.Y24 U2.Y25 U2.Y26
copper on no net:
  other v1: 3799.21,2590.55

## Keep-outs
Keep-Out Layer:
  lines w98.43: 0,3937.01 cw(c236.22,3937.01) 236.22,4173.23 12007.87,4173.23 cw(c12007.87,3937.01) 12244.09,3937.01 ; 0,3949.51 0,236.22 ccw(c236.22,236.22) 236.22,0 12007.87,0 ccw(c12007.87,236.22) 12244.09,236.22 12244.09,3949.51

## Silkscreen, mask and mechanical layers (free items; w line width, h text height)
Top Overlay:
  drawing of 13 lines, arcs and shapes, not listed
  text ".Project_Name" at 2060.6,-3205.08 h80
  text "X" at 1416.32,-3305.75 h240
  text "E" at 2927.1,-3454.64 h240
  text "2024 / Revision .Project_Revision" at 2029.41,-3470.08 h120
  text "o" at 2676.97,-3547.69 h360
  text ".Project_Designer2 / .Project_Designer1 / www.raesangur.com" at 2029.41,-3725.19 h40
  text ".Project_Designer4 / .Project_Designer3 / www.github.com/freder202" at 2029.41,-3973.22 h40
Board Outline:
  lines w5: 1700,0 236.22,0 cw(c236.22,236.22) 0,236.22 0,3937.01 cw(c236.22,3937.01) 236.22,4173.23 12007.87,4173.23 cw(c12007.87,3937.01) 12244.09,3937.01 12244.1,236.22 cw(c12007.87,236.22) 12007.87,0 2650,0
Title:
  drawing of 47 lines, arcs and shapes, not listed
  text "1" at -3661.06,9684.09 h100
  text "2" at -880.4,9684.09 h100
  text "3" at 1898.94,9684.09 h100
  text "4" at 4695.61,9684.09 h100
  text "5" at 7478.95,9684.09 h100
  text "6" at 10269.6,9684.09 h100
  text "7" at 13069.6,9684.09 h100
  text "8" at 15849.6,9684.09 h100
  text "A" at -4912.4,7826.09 h100
  text "A" at 17087.6,7826.09 h100
  text "B" at -4912.4,3896.09 h100
  text "B" at 17087.6,3896.09 h100
  text "C" at -4912.4,-23.91 h100
  text "C" at 17087.6,-23.91 h100
  text "D" at -4912.4,-3953.91 h100
  text "D" at 17087.6,-3953.91 h100
  text "ALL DIMENSIONS ARE IN THOUSANDS OF INCHES (MILS)" at 14097.6,-4275.91 h60
  text "TITLE:" at 14012.6,-4430.91 h45
  text "PASCAL-EMMANUEL LACHANCE" at 12497.6,-4445.91 h60
  text "FREDERIC BILODEAU" at 12697.76,-4570.91 h60
  text "PLEIADES" at 14562.6,-4680.91 h150
  text "DATE:" at 12512.6,-5030.91 h45
  text "PART NO.:" at 14012.6,-5030.91 h45
  text "REV:" at 16112.6,-5030.91 h45
  text ".Project_Revision" at 16382.6,-5140.91 h60
  text ".PRINT_DATE" at 12562.6,-5150.91 h70
  text "FILE NAME:" at 12512.6,-5330.91 h45
  text "DWG NO:" at 14012.6,-5330.91 h45
  text "SCALE:" at 16112.6,-5330.91 h45
  text ".PCB_FILE_NAME_NO_PATH" at 12562.6,-5450.91 h70
  text "1" at -3661.06,-5705.91 h100
  text "2" at -880.4,-5705.91 h100
  text "3" at 1898.94,-5705.91 h100
  text "4" at 4695.61,-5705.91 h100
  text "5" at 7478.95,-5705.91 h100
  text "6" at 10269.6,-5705.91 h100
  text "7" at 13069.6,-5705.91 h100
  text "8" at 15849.6,-5705.91 h100
Manufacturing Notes:
  circle w10: c3100.39,-757.87 r101.33
  circle w10: c2165.35,-167.32 r450
  lines w10: 1341.5,-1323.71 1341.5,-1538.98 1361.35,-1593.53 ; 1361.69,-1594.47 ccw(c1381.89,-1574.27) 1402.09,-1594.47 ; 1402.43,-1593.53 1422.29,-1538.98 ; 1422.29,-1243.7 1422.29,-1538.98 ; 1429.13,-1520.18 1422.29,-1538.98 ; 1435.97,-1501.39 1442.81,-1482.6 ; 1449.65,-1463.8 1456.49,-1445.01 ; 1463.33,-1426.21 1470.17,-1407.42 ; 1477.01,-1388.63 1483.85,-1369.83 ; 1490.69,-1351.04 1497.53,-1332.24 ; 1504.37,-1313.45 1511.21,-1294.66 ; 2466.54,-501.67 2470.18,-501.67 2726.38,-757.87 2992.13,-757.87 ; 1075.75,-1184.65 2837.56,-1184.65 2837.56,-1853.94 1075.75,-1853.94 1075.75,-1184.65 ; 1075.75,-1184.65 1282.44,-1184.65 1282.44,-977.95 1075.75,-977.95 1075.75,-1184.65
  text "A" at 3067.07,-807.86 h100
  text "A" at 1140.85,-1136.2 h100
  text "CHAMFER EDGES MUST BE FREE" at 1760.88,-1716.49 h40
  text "OF CUTTING BURRS." at 1760.88,-1779.04 h40
  text "1.6mm +/- 10%" at 1135.31,-1798.72 h40

## Dimensions
0,0 to 1793.31,-339.96 on Dimensions
2248.03,11.81 to 0,236.22 on Dimensions
236.22,4173.23 to 236.22,0 on Dimensions
0,3937.01 to 12244.09,3937.01 on Dimensions
1341.5,-1538.98 to 1422.29,-1538.98 on Manufacturing Notes
1422.29,-1538.98 to 1511.21,-1294.66 on Manufacturing Notes